# EAGLE board RGB_Fan_Controller_Rev_C (EAGLE 5.06)
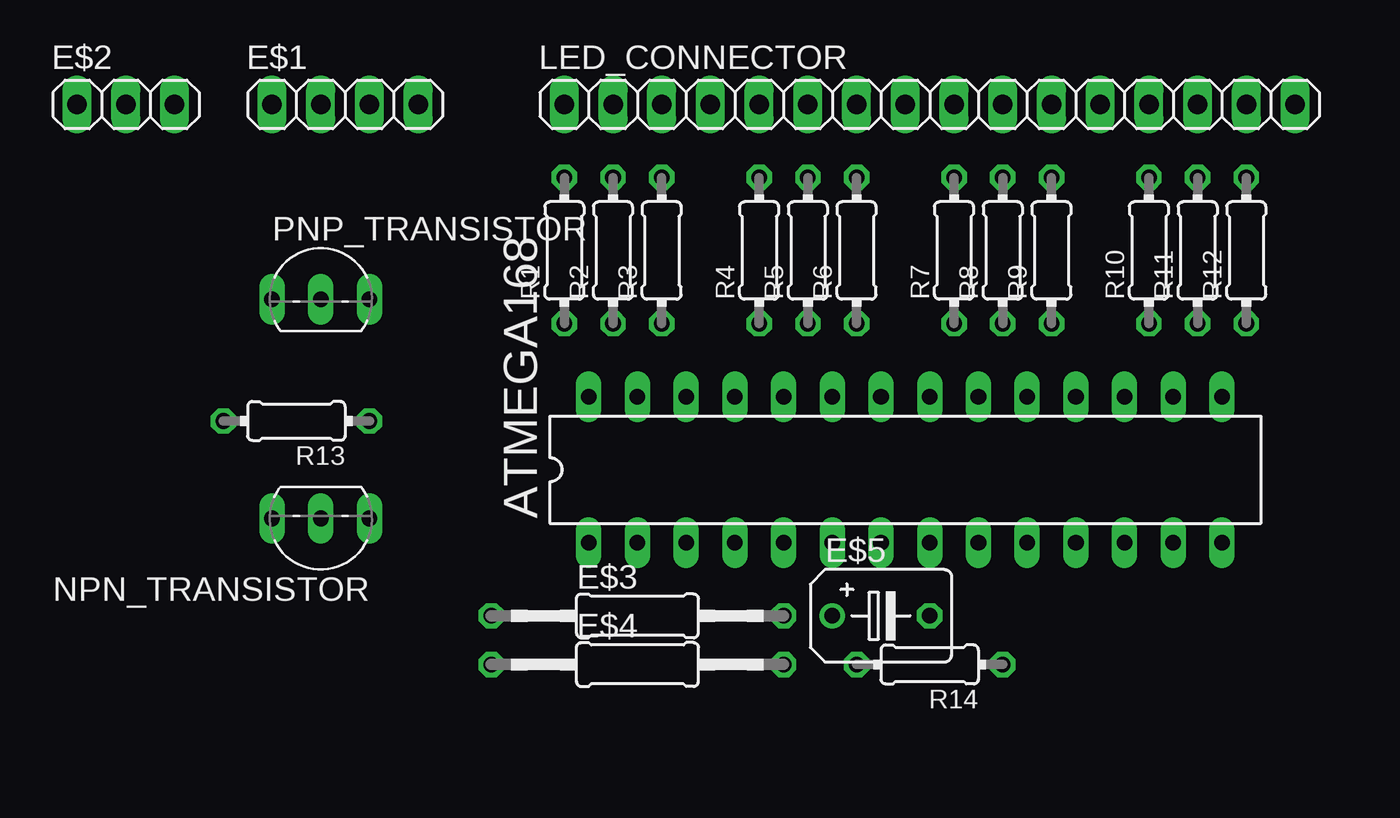
[diagram p0: board, top side]
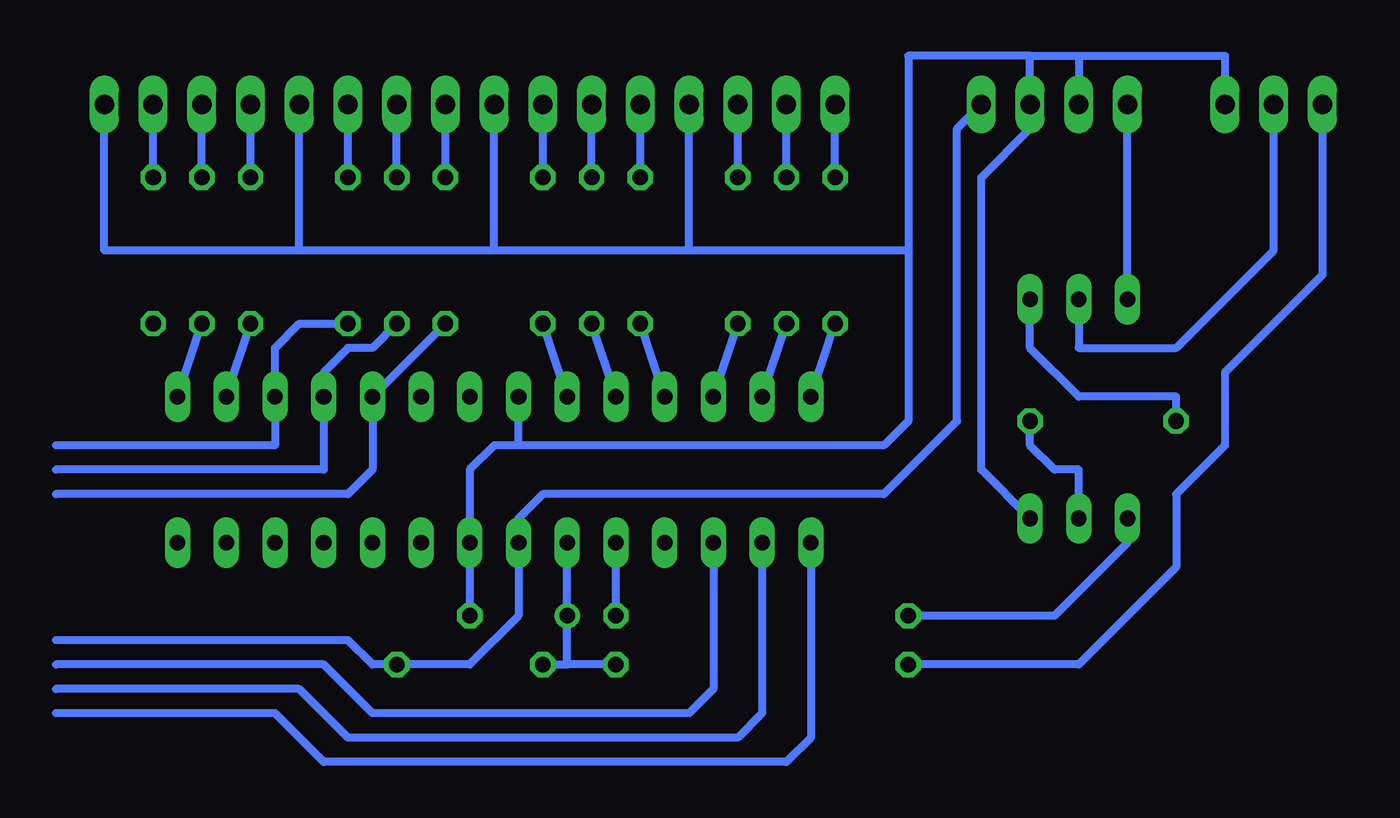
[diagram p1: board, bottom side, seen from below]

No outline drawn. Coordinates in mm, seen from the top.
Copper layers (1*16): Top 0.035mm / dielectric 1.5mm / Bottom 0.035mm
Design rules "default": minimum track width 10mil, minimum drill 24mil, track to track 8mil, track to pad 8mil, pad to pad 8mil, via to via 8mil, smd to smd 8mil, copper to edge 40mil, drill to drill 8mil, minimum pad ring 10mil, minimum via ring 8mil, stop-mask expansion 4mil, vias tented up to drill 0mil, thermal gap 10mil

## Footprints (pad centres in the part's own frame; a part is rotated, then mirrored left to right if it is on the bottom)
DIL28-3 = drill 0.813 long: 1 -16.51,-3.81; 2 -13.97,-3.81; 3 -11.43,-3.81; 4 -8.89,-3.81; 5 -6.35,-3.81; 6 -3.81,-3.81; 7 -1.27,-3.81; 8 1.27,-3.81; 9 3.81,-3.81; 10 6.35,-3.81; 11 8.89,-3.81; 12 11.43,-3.81; 13 13.97,-3.81; 14 16.51,-3.81; 15 16.51,3.81; 16 13.97,3.81; 17 11.43,3.81; 18 8.89,3.81; 19 6.35,3.81; 20 3.81,3.81; 21 1.27,3.81; 22 -1.27,3.81; 23 -3.81,3.81; 24 -6.35,3.81; 25 -8.89,3.81; 26 -11.43,3.81; 27 -13.97,3.81; 28 -16.51,3.81
1X04 = drill 1.016 long: 1 -3.81,0; 2 -1.27,0; 3 1.27,0; 4 3.81,0
1X03 = drill 1.016 long: 1 -2.54,0; 2 0,0; 3 2.54,0
0207/15 = drill 0.813 octagon: 1 -7.62,0; 2 7.62,0
B45181B = drill 0.813 round: + -2.54,0 | drill 0.813 octagon: - 2.54,0
1X16 = drill 1.016 long: 1 -19.05,0; 2 -16.51,0; 3 -13.97,0; 4 -11.43,0; 5 -8.89,0; 6 -6.35,0; 7 -3.81,0; 8 -1.27,0; 9 1.27,0; 10 3.81,0; 11 6.35,0; 12 8.89,0; 13 11.43,0; 14 13.97,0; 15 16.51,0; 16 19.05,0
TO92-BCE = drill 0.813 long: B -2.54,0; C 0,0; E 2.54,0
0204/7 = drill 0.813 octagon: 1 -3.81,0; 2 3.81,0

## Placement (x,y rotation side)
ATMEGA168  [DIL28-3]  49.53,13.97 0 top
E$1  [1X04]  20.32,33.02 0 top
E$2  [1X03]  8.89,33.02 0 top
E$3  [0207/15]  35.56,6.35 0 top
E$4  [0207/15]  35.56,3.81 0 top
E$5  [B45181B]  48.26,6.35 0 top
LED_CONNECTOR  [1X16]  50.8,33.02 0 top
NPN_TRANSISTOR  [TO92-BCE]  19.05,11.43 180 top
PNP_TRANSISTOR  [TO92-BCE]  19.05,22.86 0 top
R1  [0204/7]  31.75,25.4 90 top
R2  [0204/7]  34.29,25.4 90 top
R3  [0204/7]  36.83,25.4 90 top
R4  [0204/7]  41.91,25.4 90 top
R5  [0204/7]  44.45,25.4 90 top
R6  [0204/7]  46.99,25.4 90 top
R7  [0204/7]  52.07,25.4 90 top
R8  [0204/7]  54.61,25.4 90 top
R9  [0204/7]  57.15,25.4 90 top
R10  [0204/7]  62.23,25.4 90 top
R11  [0204/7]  64.77,25.4 90 top
R12  [0204/7]  67.31,25.4 90 top
R13  [0204/7]  17.78,16.51 180 top
R14  [0204/7]  50.8,3.81 180 top

## Library data of the parts
ATMEGA168 = atmel
E$1 E$2 LED_CONNECTOR = pinhead
E$3-E$5 R1-R14 = resistor
NPN_TRANSISTOR PNP_TRANSISTOR = transistor

## Nets
POWER: ATMEGA168.8 ATMEGA168.22 E$1.3 E$2.3 NPN_TRANSISTOR.B
S$1: E$1.1 PNP_TRANSISTOR.B
S$2: ATMEGA168.7 E$1.4
S$3: ATMEGA168.28 R1.1
S$4: ATMEGA168.27 R2.1
S$5: ATMEGA168.26 R3.1
S$6: ATMEGA168.25 R4.1
S$7: ATMEGA168.24 R5.1
S$8: ATMEGA168.23 R6.1
S$9: ATMEGA168.17 R9.1
S$10: NPN_TRANSISTOR.C R13.1
S$11: ATMEGA168.19 R7.1
S$12: ATMEGA168.16 R10.1
S$13: ATMEGA168.15 R11.1
S$14: PNP_TRANSISTOR.E R13.2
S$15: R3.2
S$16: R2.2
S$17: R1.2
S$18: R4.2
S$19: R5.2
S$20: R6.2
S$21: R7.2
S$22: R8.2
S$23: R9.2
S$24: R10.2
S$25: R11.2
S$26: R12.2
S$27: ATMEGA168.18 R8.1
S$28: E$3.1 NPN_TRANSISTOR.E
S$29: ATMEGA168.5 E$3.2
S$30: E$2.2 PNP_TRANSISTOR.C
S$31: ATMEGA168.6 E$4.2 R14.2
S$32: E$2.1
S$33: ATMEGA168.1
S$34: ATMEGA168.2
S$35: ATMEGA168.3

## Tracks (layer width: path | path; a pad name or v marks a point on that pad's centre or on a via)
POWER
  Bottom 0.406: 69.85,34.29 69.85,25.4 59.69,25.4 | 48.26,15.24 49.53,15.24 50.8,13.97 ATMEGA168.8 50.8,6.35 | 48.26,15.24 ATMEGA168.22 | 59.69,25.4 59.69,34.29 | 49.53,25.4 59.69,25.4 | 49.53,25.4 49.53,34.29 | 48.26,15.24 29.21,15.24 27.94,16.51 27.94,25.4 | 39.37,25.4 49.53,25.4 | 39.37,25.4 39.37,34.29 | 27.94,25.4 39.37,25.4 | E$2.3 11.43,35.56 19.05,35.56 | 19.05,35.56 19.05,31.75 | 27.94,25.4 27.94,35.56 21.59,35.56 | 21.59,35.56 19.05,35.56 | 21.59,35.56 E$1.3 21.59,31.75 24.13,29.21 24.13,13.97 NPN_TRANSISTOR.B
S$1
  Bottom 0.406: PNP_TRANSISTOR.B E$1.1
S$2
  Bottom 0.406: E$1.4 25.4,31.75 25.4,16.51 29.21,12.7 46.99,12.7 48.26,11.43 ATMEGA168.7 48.26,6.35 50.8,3.81 55.88,3.81 57.15,5.08 72.39,5.08
S$3
  Bottom 0.406: ATMEGA168.28 R1.1
S$4
  Bottom 0.406: ATMEGA168.27 R2.1
S$5
  Bottom 0.406: ATMEGA168.26 R3.1
S$6
  Bottom 0.406: ATMEGA168.25 R4.1
S$7
  Bottom 0.406: ATMEGA168.24 R5.1
S$8
  Bottom 0.406: ATMEGA168.23 R6.1
S$9
  Bottom 0.406: R9.1 59.69,21.59 60.96,20.32 ATMEGA168.17 60.96,15.24 72.39,15.24
S$10
  Bottom 0.406: NPN_TRANSISTOR.C 19.05,13.97 20.32,13.97 21.59,15.24 R13.1
S$11
  Bottom 0.406: R7.1 ATMEGA168.19 55.88,13.97 57.15,12.7 72.39,12.7
S$12
  Bottom 0.406: ATMEGA168.16 R10.1
S$13
  Bottom 0.406: ATMEGA168.15 R11.1
S$14
  Bottom 0.406: R13.2 13.97,17.78 19.05,17.78 21.59,20.32 PNP_TRANSISTOR.E
S$15
  Bottom 0.406: R3.2 36.83,34.29
S$16
  Bottom 0.406: R2.2 34.29,34.29
S$17
  Bottom 0.406: R1.2 31.75,34.29
S$18
  Bottom 0.406: R4.2 41.91,34.29
S$19
  Bottom 0.406: R5.2 44.45,34.29
S$20
  Bottom 0.406: R6.2 46.99,34.29
S$21
  Bottom 0.406: R7.2 52.07,34.29
S$22
  Bottom 0.406: R8.2 54.61,34.29
S$23
  Bottom 0.406: R9.2 57.15,34.29
S$24
  Bottom 0.406: R10.2 62.23,34.29
S$25
  Bottom 0.406: R11.2 64.77,34.29
S$26
  Bottom 0.406: R12.2 67.31,34.29
S$27
  Bottom 0.406: R8.1 55.88,20.32 57.15,20.32 58.42,19.05 ATMEGA168.18 58.42,13.97 72.39,13.97
S$28
  Bottom 0.406: NPN_TRANSISTOR.E 16.51,10.16 20.32,6.35 E$3.1
S$29
  Bottom 0.406: E$3.2 ATMEGA168.5
S$30
  Bottom 0.406: PNP_TRANSISTOR.C 19.05,20.32 13.97,20.32 8.89,25.4 E$2.2
S$31
  Bottom 0.406: R14.2 45.72,3.81 | E$4.2 45.72,3.81 | 45.72,3.81 ATMEGA168.6
S$32
  Bottom 0.406: E$2.1 6.35,24.13 11.43,19.05 11.43,15.24 13.97,12.7 13.97,8.89 19.05,3.81 27.94,3.81
S$33
  Bottom 0.406: ATMEGA168.1 33.02,0 34.29,-1.27 58.42,-1.27 60.96,1.27 72.39,1.27
S$34
  Bottom 0.406: ATMEGA168.2 35.56,1.27 36.83,0 57.15,0 59.69,2.54 72.39,2.54
S$35
  Bottom 0.406: ATMEGA168.3 38.1,2.54 39.37,1.27 55.88,1.27 58.42,3.81 72.39,3.81